# Altium PCB CoC-PCB V1 PANEL.PcbDoc
Units mm, origin at the board's own origin, x right, y up, seen from the top; angles counter-clockwise.
Board outline 263.06 x 101.25 mm, 4 copper layers (Top Layer, Mid-Layer 1, Mid-Layer 2, Bottom Layer), stack 1.508 mm thick; 8 components, 0 nets, 8 pads, 0 vias.
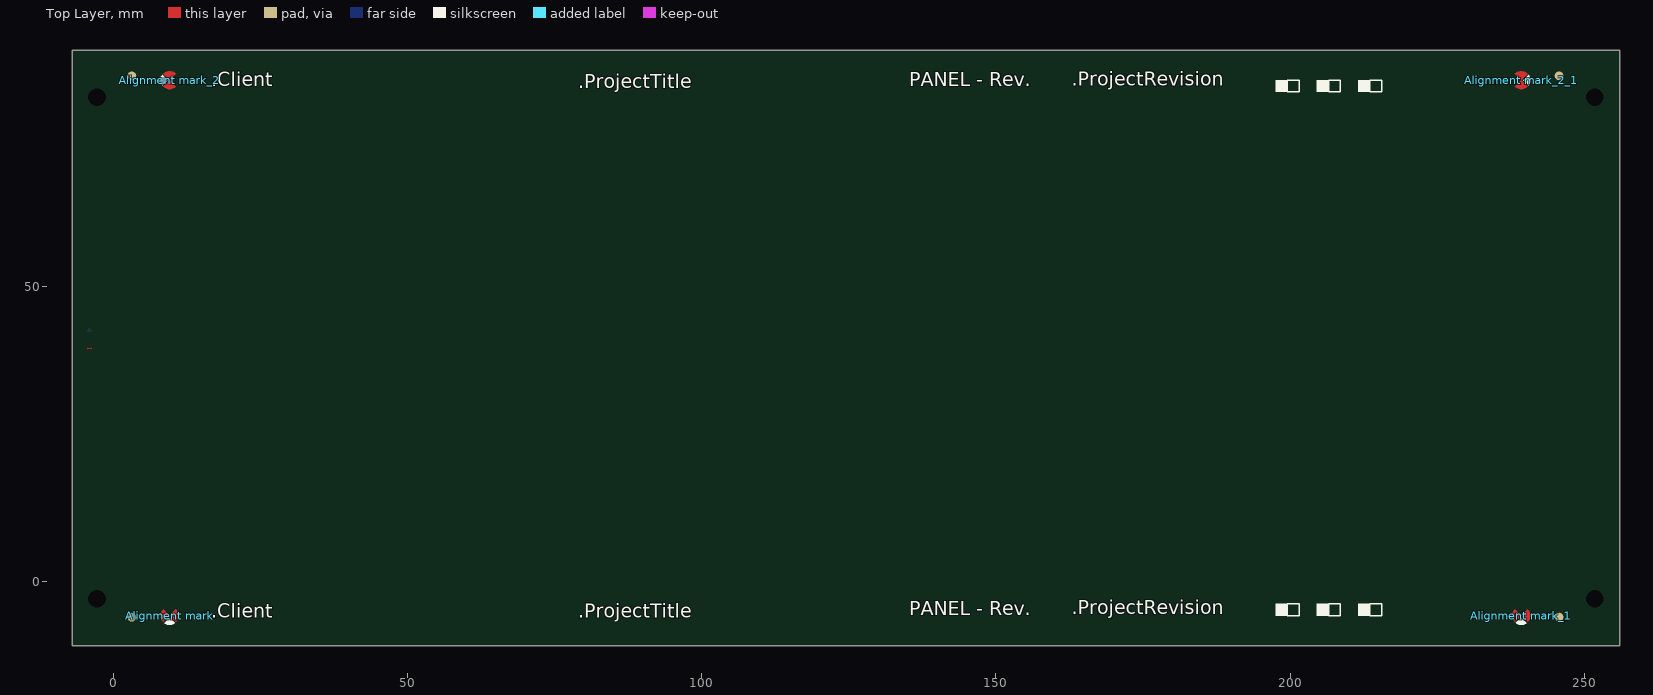
[diagram p0: Top Layer view]
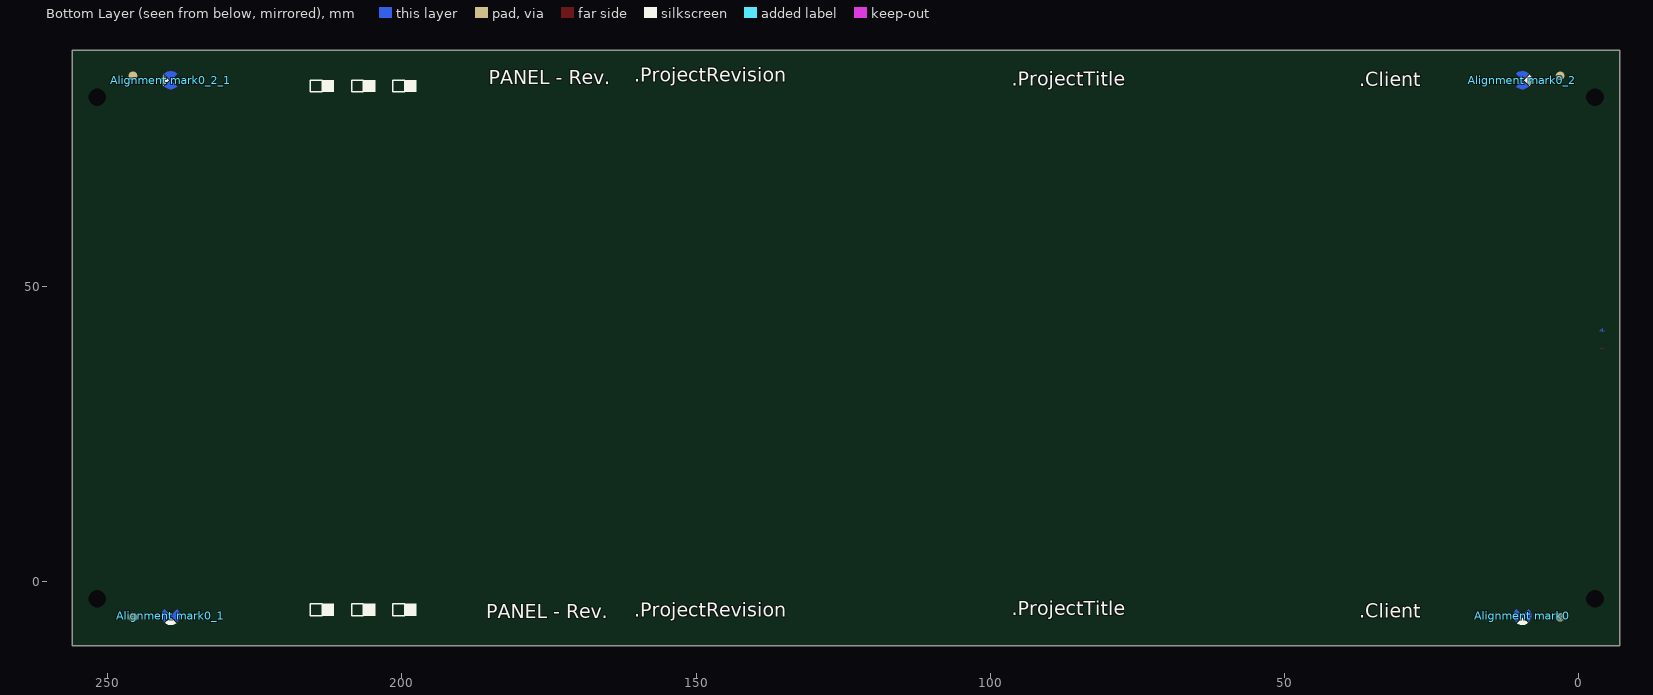
[diagram p1: Bottom Layer view, seen from below]
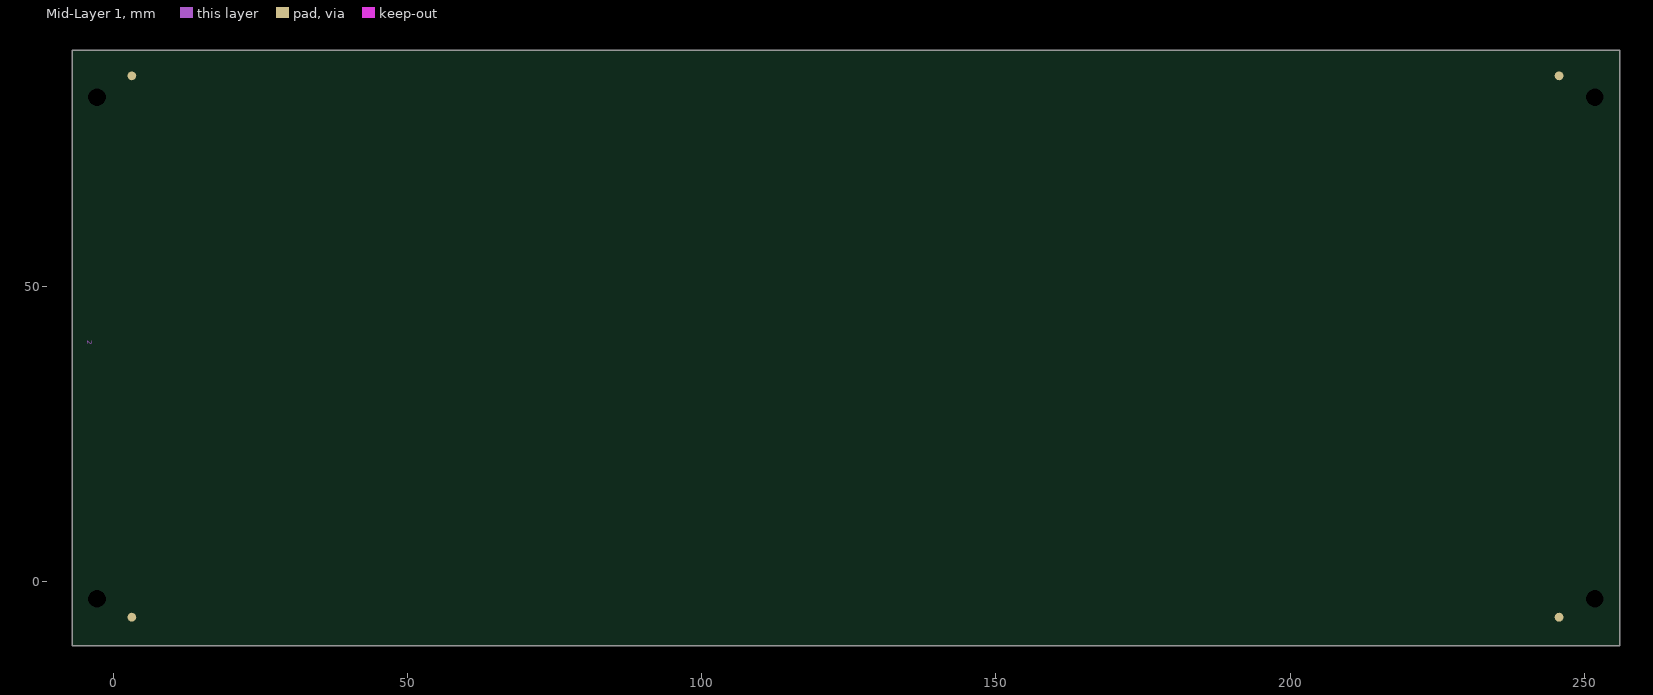
[diagram p2: Mid-Layer 1]
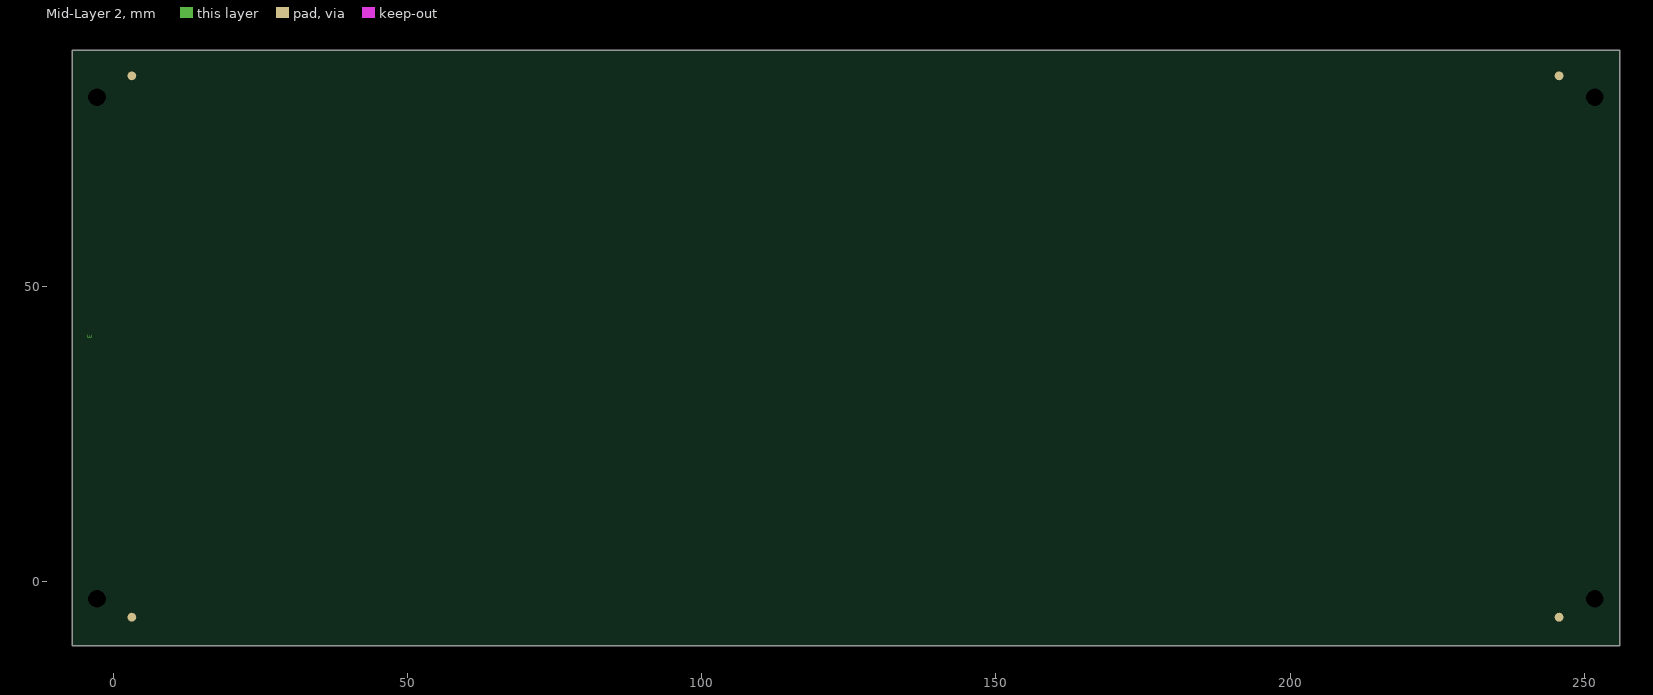
[diagram p3: Mid-Layer 2]

## Layer stack, top to bottom
Top Solder: solder mask 0.0102, Solder Resist, Dk 3.5
Top Layer: signal copper 0.018
Dielectric1: prepreg 0.1, FR-4, Dk 4.8
Mid-Layer 1: signal copper 0.036
Dielectric2: core 1.2, FR-4, Dk 4.8
Mid-Layer 2: signal copper 0.036
Dielectric3: prepreg 0.1, FR-4, Dk 4.8
Bottom Layer: signal copper 0.018
Bottom Solder: solder mask 0.0102, Solder Resist, Dk 3.5

## Board outline
-7.01,-10.999 -7.01,90.251 256.053,90.251 256.053,-10.999

## Design rules (kind name [scope] priority, off if disabled: settings)
Clearance [All] p1: gap=0.254 ignorepadtopadclearanceinfootprint=FALSE except(0: Arc-Hole Track-Hole SMDPad-Hole THPad-Hole Via-Hole Fill-Hole Poly-Hole Region-Hole Text-Hole)
PolygonConnect [All] p1: connectstyle=Relief reliefconductorwidth=0.254 reliefentries=4 polygonreliefangle="90 Angle" airgapwidth=0.254
RoutingVias [All] p1: holewidth=0.711 width=1.27 viastyle="Through Hole" minholewidth=0.711 minwidth=1.27 maxholewidth=0.711 maxwidth=1.27
SolderMaskExpansion [All] p1: expansion=0.102
Width [All] p1: maxlimit=0.254 minlimit=0.254 preferedwidth=0.254
30 further rules are at their usual default settings.

## Components (designator, comment, footprint, x,y, rotation, side; value= is the part's Value field where it differs from the comment)
"Alignment mark" "Alignment mark" "Alignment mark" 9.553,-5.849 r0 top
"Alignment mark0" "Alignment mark" "Alignment mark" 9.553,-5.849 r180 bottom
"Alignment mark0_1" "Alignment mark" "Alignment mark" 239.304,-5.849 r0 bottom
"Alignment mark0_2" "Alignment mark" "Alignment mark" 9.553,85.151 r90 bottom
"Alignment mark0_2_1" "Alignment mark" "Alignment mark" 239.304,85.151 r90 bottom
"Alignment mark_1" "Alignment mark" "Alignment mark" 239.304,-5.849 r180 top
"Alignment mark_2" "Alignment mark" "Alignment mark" 9.553,85.151 r270 top
"Alignment mark_2_1" "Alignment mark" "Alignment mark" 239.304,85.151 r270 top

## Footprints (in the part's own frame and the unit in brackets; to place one, negate y for a bottom-side part, rotate by r counter-clockwise, add the part's x,y. Pads: shape width x height; smd on the part's side, far side on the other; paste and mask are expansions set on the pad)
"Alignment mark" [mm]
  Top Layer region: 1.078,-1.078 1.408,-0.583 1.524,0 1.408,0.583 1.078,1.078 1.078,1.078 0,0
  Top Layer region: -1.078,-1.078 -1.408,-0.583 -1.524,0 -1.408,0.583 -1.078,1.078 -1.078,1.078 0,0
  silkscreen extent -0.9,-1.6 0.9,-0.36

## Free pads (board coordinates)
  round 0 hole 3 unplated: 0(-2.806,-2.999) 0(-2.806,82.251) 0(251.794,-2.999) 0(251.794,82.251)
  round 1.5 all layers, no hole mask+1: 0(3.128,-6.121) 0(3.128,85.889) 0(245.728,-6.121) 0(245.728,85.889)

## Nets (pads, with @x,y where several pads share a name; then routed paths per layer and width w, separated by ;. In a path a pad name is that pad's centre, name@x,y a point inside that pad or via, vN(x,y) a via of type N, cw(c..) or ccw(c..) an arc to the next point about the centre after c; other vN are vias at no path point)

## Other copper
Top Layer:
  text "1" at -4.427,39.919 h0.89 r270
Mid-Layer 1:
  text "2" at -4.453,40.935 h0.89 r270
Mid-Layer 2:
  text "3" at -4.427,41.951 h0.89 r270
Bottom Layer:
  text "4" at -4.427,42.967 h0.89 r270

## Silkscreen, mask and mechanical layers (free items; w line width, h text height)
Top Overlay:
  region: 213.553,83.151 211.553,83.151 211.553,85.151 213.553,85.151
  region: 206.553,83.151 204.553,83.151 204.553,85.151 206.553,85.151
  region: 199.553,83.151 197.553,83.151 197.553,85.151 199.553,85.151
  region: 199.553,-5.849 197.553,-5.849 197.553,-3.849 199.553,-3.849
  region: 206.553,-5.849 204.553,-5.849 204.553,-3.849 206.553,-3.849
  region: 213.553,-5.849 211.553,-5.849 211.553,-3.849 213.553,-3.849
  lines w0.254: 199.553,-5.849 201.553,-5.849 201.553,-3.849 199.553,-3.849 199.553,-5.849 ; 199.553,83.151 199.553,85.151 201.553,85.151 201.553,83.151 199.553,83.151 ; 206.553,-5.849 208.553,-5.849 208.553,-3.849 206.553,-3.849 206.553,-5.849 ; 206.553,83.151 206.553,85.151 208.553,85.151 208.553,83.151 206.553,83.151 ; 213.553,-5.849 215.553,-5.849 215.553,-3.849 213.553,-3.849 213.553,-5.849 ; 213.553,83.151 213.553,85.151 215.553,85.151 215.553,83.151 213.553,83.151
  text ".ProjectRevision" at 162.92,83.401 h4
  text ".Client" at 16.628,83.377 h4
  text "PANEL - Rev." at 135.288,83.331 h4
  text ".ProjectTitle" at 79,83 h4
  text ".ProjectRevision" at 162.92,-6.357 h4
  text "PANEL - Rev." at 135.288,-6.601 h4
  text ".Client" at 16.628,-6.987 h4
  text ".ProjectTitle" at 79,-7 h4
Bottom Overlay:
  region: 213.553,83.151 211.553,83.151 211.553,85.151 213.553,85.151
  region: 206.553,83.151 204.553,83.151 204.553,85.151 206.553,85.151
  region: 199.553,83.151 197.553,83.151 197.553,85.151 199.553,85.151
  region: 199.553,-5.849 197.553,-5.849 197.553,-3.849 199.553,-3.849
  region: 206.553,-5.849 204.553,-5.849 204.553,-3.849 206.553,-3.849
  region: 213.553,-5.849 211.553,-5.849 211.553,-3.849 213.553,-3.849
  lines w0.254: 199.553,-5.849 201.553,-5.849 201.553,-3.849 199.553,-3.849 199.553,-5.849 ; 199.553,83.151 199.553,85.151 201.553,85.151 201.553,83.151 199.553,83.151 ; 206.553,-5.849 208.553,-5.849 208.553,-3.849 206.553,-3.849 206.553,-5.849 ; 206.553,83.151 206.553,85.151 208.553,85.151 208.553,83.151 206.553,83.151 ; 213.553,-5.849 215.553,-5.849 215.553,-3.849 213.553,-3.849 213.553,-5.849 ; 213.553,83.151 213.553,85.151 215.553,85.151 215.553,83.151 213.553,83.151
  text ".ProjectRevision" at 160.553,84.151 h4
  text "PANEL - Rev." at 185.28,83.691 h4
  text ".ProjectTitle" at 96.309,83.419 h4
  text ".Client" at 37.261,83.377 h4
  text ".ProjectTitle" at 96.309,-6.55 h4
  text ".ProjectRevision" at 160.553,-6.849 h4
  text ".Client" at 37.261,-6.987 h4
  text "PANEL - Rev." at 185.694,-7.068 h4
Top Paste:
  drawing of 612 lines, arcs and shapes, not listed
  text ".Client" at -81.874,-165.828 h7
  text ".ProjectTitle" at -81.474,-172.553 h7
  text "Top Paste" at -81.174,-178.903 h7
  text "Rev:" at -81.174,-186.903 h7
  text ".ProjectRevision" at -67.174,-186.903 h7
  text "30/05/2019" at -81.174,-193.903 h7
Bottom Paste:
  drawing of 612 lines, arcs and shapes, not listed
  text ".Client" at 336.526,-165.828 h7
  text ".ProjectTitle" at 336.126,-172.553 h7
  text "Bottom Paste" at 335.826,-178.903 h7
  text ".ProjectRevision" at 321.826,-186.903 h7
  text "Rev:" at 335.826,-186.903 h7
  text "30/05/2019" at 335.826,-193.903 h7
Top Solder:
  rectangle: -4.935,38.903 -2.903,43.475
Bottom Solder:
  rectangle: -4.935,38.903 -2.903,43.475
Mechanical 1:
  the board outline again, w0.254
Mechanical 4:
  lines w0.127: -13.462,79.25 269.926,79.25 ; -9.828,0 269.926,0 ; 0,-15.983 0,92.61 ; 82.053,-16.078 82.053,92.61 ; 167.053,-16.085 167.053,92.604 ; 249.053,-15.983 249.053,92.61
  lines w0.2: -16.485,79.25 -14.46,79.25 ; -14.835,78.925 -14.46,79.25 ; -14.785,79.625 -14.46,79.25 ; -12.241,-0.127 -10.216,-0.127 ; -10.591,-0.452 -10.216,-0.127 ; -10.541,0.248 -10.216,-0.127 ; -0.372,93.485 0.003,93.16 ; -0.147,-17.322 0.228,-16.997 ; 0.003,95.185 0.003,93.16 ; 0.228,-19.022 0.228,-16.997 ; 0.328,93.535 0.003,93.16 ; 0.553,-17.372 0.228,-16.997 ; 81.669,-16.714 82.044,-16.389 ; 81.681,93.485 82.056,93.16 ; 82.044,-18.414 82.044,-16.389 ; 82.056,95.185 82.056,93.16 ; 82.369,-16.764 82.044,-16.389 ; 82.381,93.535 82.056,93.16 ; 166.669,-16.72 167.044,-16.395 ; 166.681,93.479 167.056,93.154 ; 167.044,-18.42 167.044,-16.395 ; 167.056,95.179 167.056,93.154 ; 167.369,-16.77 167.044,-16.395 ; 167.381,93.529 167.056,93.154 ; 248.678,-16.803 249.053,-16.478 ; 248.681,93.485 249.056,93.16 ; 249.053,-18.503 249.053,-16.478 ; 249.056,95.185 249.056,93.16 ; 249.378,-16.853 249.053,-16.478 ; 249.381,93.535 249.056,93.16 ; 271.23,78.774 270.905,79.149 ; 271.28,79.474 270.905,79.149 ; 271.605,-0.37 271.28,0.005 ; 271.655,0.33 271.28,0.005 ; 272.93,79.149 270.905,79.149 ; 273.305,0.005 271.28,0.005
  text "V-cut" at 0.428,100.71 h1 r90
  text "V-cut" at 82.481,100.71 h1 r90
  text "V-cut" at 167.481,100.704 h1 r90
  text "V-cut" at 249.481,100.71 h1 r90
  text "V-cut" at -22.01,78.825 h1
  text "V-cut" at 273.515,78.636 h1
  text "V-cut" at 273.89,-0.508 h1
  text "V-cut" at -17.766,-0.552 h1
  text "V-cut" at 82.469,-23.939 h1 r90
  text "V-cut" at 167.469,-23.945 h1 r90
  text "V-cut" at 249.478,-24.028 h1 r90
  text "V-cut" at 0.653,-24.547 h1 r90
Mechanical 6:
  drawing of 438 lines, arcs and shapes, not listed
  text "PLEASE REPORT ALL ERRORS" at 380.568,207.509 h3
  text "SPECIFICATION" at 399.364,199.889 h2.54
  text "TYPE" at 377.665,196.029 h1.52
  text "MULTI LAYER - FR4" at 409.89,196.029 h1.52
  text "PLATED THROUGH HOLE" at 409.89,193.489 h1.52
  text "FOUR (4) LAYER" at 409.863,190.534 h1.52
  text "LAYERS" at 377.665,190.314 h1.52
  text "GLASS FIBRE EPOXY RESIN NEMA" at 409.863,187.284 h1.52
  text "MATERIAL" at 377.665,187.139 h1.52
  text "GRADE FR4 Tg>=150-160C Td>=335C" at 409.89,184.599 h1.52
  text "FLAMMABILITY RATING 94-V0" at 409.89,182.186 h1.52
  text "FINISH" at 378.019,174.769 h1.52
  text "ENIG" at 409.355,174.694 h1.52
  text "TRACKS:" at 377.952,172.093 h1.52
  text "SOLDERMASK OVER BARE COPPER" at 409.18,171.466 h1.52
  text "PADS:" at 378.127,169.118 h1.52
  text "VIAS TENTED AS PER DESIGN FILE" at 409.555,168.691 h1.52
  text "35um" at 409.397,164.329 h1.52
  text "OUTER COPPER / (PRIMARY+SECONDARY)" at 377.774,162.424 h1.52
  text "THICKNESS (finished)" at 377.647,158.995 h1.52
  text "1.6 mm" at 409.524,158.995 h1.52
  text "NONE" at 409.778,155.312 h1.52
  text "BLIND OR BURIED VIAS" at 377.774,155.185 h1.52
  text "AS PER DESIGN FILE" at 409.778,151.121 h1.52
  text "INTERNAL CUTOUTS" at 377.647,150.867 h1.52
  text "EXTERNAL CUTOUTS" at 377.901,147.184 h1.52
  text "AS PER DESIGN FILE" at 409.905,147.184 h1.52
  text "Altium Designer .Application_BuildNumber" at 409.89,143.959 h1.52
  text "ARTWORK TYPE" at 377.774,143.374 h1.52
  text "MINIMUM TRACK WIDTH" at 377.665,140.149 h1.52
  text "7 mil (0.178mm)" at 409.89,140.149 h1.52
  text "MINIMUM CLEARANCE" at 377.665,137.609 h1.52
  text "5 mil (0.127mm)" at 409.89,137.609 h1.52
  text "MIMIMUM PAD WIDTH" at 377.79,135.219 h1.52
  text "7 mil (0.178mm)" at 409.946,135.028 h1.52
  text "SOLDER MASK" at 377.7,131.28 h1.52
  text "TYPE:" at 377.7,128.105 h1.52
  text "LIQUID PHOTOIMAGABLE" at 410.026,128.062 h1.52
  text "SIDES:" at 377.7,125.565 h1.52
  text "PRIMARY & SECONDARY" at 410.026,125.268 h1.52
  text "COLOUR:" at 377.74,122.344 h1.52
  text "BLACK" at 409.965,122.344 h1.52
  text "COMP OVERLAY" at 377.52,117.339 h1.52
  text "SIDES:" at 377.52,114.164 h1.52
  text "PRIMARY & SECONDARY" at 409.778,114.164 h1.52
  text "COLOUR:" at 377.52,111.116 h1.52
  text "WHITE - PHOTO IMAGEABLE" at 409.905,111.116 h1.52
  text "USE NC ROUTING" at 409.905,107.687 h1.52
  text "PROFILING" at 377.647,107.56 h1.52
  text "STANDARD" at 410.032,103.242 h1.52
  text "ELECTRICAL TEST" at 377.647,103.115 h1.52
  text "ISO9001:2000" at 409.933,99.696 h1.52
  text "MANUFACTURER'S / ACCREDITATION" at 377.52,96.638 h1.52
  text "ASSEMBLY NOTES" at 381.766,85.238 h5.08
  text "MANUFACTURING PROCESS" at 381.766,73.497 h3.05
  text "1. Reflow Top and Bottom side" at 383.036,67.825 h2.29
  text "2. Hand solder as required" at 383.036,62.745 h2.29
  text "ALL DIMENSIONS IN" at 400.873,46.141 h2.5
  text "MILLIMETRES, UNLESS" at 400.873,41.855 h2.5
  text "NOTED OTHERWISE" at 400.873,37.57 h2.5
  text "TOLERANCE" at 399.873,31.53 h3
  text "+" at 407.56,24.943 h2.43
  text "0.25mm" at 411.501,24.102 h2.5
  text "LIN." at 400.382,24.081 h2.43
  text "-" at 407.56,22.891 h2.43
  text "+" at 409.11,20.856 h2.43
  text "ANG." at 400.382,19.915 h2.43
  text "1.0 DEGREES" at 413.001,19.918 h2.5
  text "-" at 409.11,18.804 h2.43
  text "+" at 424.211,16.015 h2.43
  text "HOLE DIA" at 400.382,15.746 h2.43
  text "0.05mm" at 427.694,15.513 h2.5
  text "-" at 424.211,14.171 h2.43
  text "UNLESS OTHERWISE STATED" at 400.382,11.096 h1.5
  text "Layer" at 336.227,-8.856 h1.52
  text "Name" at 346.638,-8.856 h1.52
  text "Material" at 370.254,-8.856 h1.52
  text "Thickness" at 392.092,-8.856 h1.52
  text "Constant" at 408.598,-8.856 h1.52
  text "Board Layer Stack" at 423.072,-8.856 h1.52
  text "Top Overlay" at 346.638,-11.904 h1.52
  text "Top Solder" at 346.638,-14.952 h1.52
  text "Solder Resist" at 370.254,-14.952 h1.52
  text "0.010mm" at 392.092,-14.952 h1.52
  text "3.5" at 408.598,-14.952 h1.52
  text "1" at 336.227,-18 h1.52
  text "Top Layer" at 346.638,-18 h1.52
  text "Copper" at 370.254,-18 h1.52
  text "0.018mm" at 392.092,-18 h1.52
  text "Dielectric1" at 346.638,-21.048 h1.52
  text "FR-4" at 370.254,-21.048 h1.52
  text "0.100mm" at 392.092,-21.048 h1.52
  text "4.8" at 408.598,-21.048 h1.52
  text "2" at 336.227,-24.096 h1.52
  text "Mid-Layer 1" at 346.638,-24.096 h1.52
  text "Copper" at 370.254,-24.096 h1.52
  text "0.036mm" at 392.092,-24.096 h1.52
  text "Dielectric2" at 346.638,-27.144 h1.52
  text "FR-4" at 370.254,-27.144 h1.52
  text "1.200mm" at 392.092,-27.144 h1.52
  text "4.8" at 408.598,-27.144 h1.52
  text "3" at 336.227,-30.192 h1.52
  text "Mid-Layer 2" at 346.638,-30.192 h1.52
  text "Copper" at 370.254,-30.192 h1.52
  text "0.036mm" at 392.092,-30.192 h1.52
  text "Dielectric3" at 346.638,-33.24 h1.52
  text "FR-4" at 370.254,-33.24 h1.52
  text "0.100mm" at 392.092,-33.24 h1.52
  text "4.8" at 408.598,-33.24 h1.52
  text "4" at 336.227,-36.288 h1.52
  text "Bottom Layer" at 346.638,-36.288 h1.52
  text "Copper" at 370.254,-36.288 h1.52
  text "0.018mm" at 392.092,-36.288 h1.52
  text "Bottom Solder" at 346.638,-39.336 h1.52
  text "Solder Resist" at 370.254,-39.336 h1.52
  text "0.010mm" at 392.092,-39.336 h1.52
  text "3.5" at 408.598,-39.336 h1.52
  text "Bottom Overlay" at 346.638,-42.384 h1.52
  text "MECHANICAL LAYER LEGEND" at 334.559,-85.849 h5
  text "LAYER" at 335.292,-92.963 h2
  text "DESCRIPTION" at 348.573,-92.963 h2
  text "1" at 335.292,-97.315 h2
  text "BOARD OUTLINE" at 348.573,-97.315 h2
  text "2" at 335.292,-101.668 h2
  text "DIMENSIONS" at 348.573,-101.668 h2
  text "11" at 335.292,-106.02 h2
  text "BOARD CUTOUT" at 348.573,-106.02 h2
  text "4" at 335.292,-110.373 h2
  text "V-SCORE (V-CUT)" at 348.573,-110.373 h2
  text "6" at 335.292,-114.725 h2
  text "SPECIFICATIONS" at 348.573,-114.748 h2
  text "15" at 335.292,-119.078 h2
  text "COMPONENT COURTYARD" at 348.573,-119.078 h2
  text "16" at 335.292,-123.43 h2
  text "DOCUMENT OUTLINE" at 348.573,-123.43 h2
  text "~" at 335.292,-127.783 h2
  text "~" at 348.573,-127.784 h2
  text "~" at 335.292,-132.135 h2
  text "~" at 348.573,-132.135 h2
  text "~" at 335.292,-136.488 h2
  text "~" at 348.573,-136.488 h2
  text "ENGINEER:" at 250.504,-143.392 h1.14
  text "TITLE:" at 288.604,-143.392 h1.14
  text ".Engineer" at 251.774,-146.567 h1.78
  text "SHEET" at 154.748,-148.606 h2.4
  text "Tekt Industries Pty. Ltd." at 366.582,-149.869 h3.3
  text ".ProjectTitle" at 290.269,-150.278 h5
  text "PCB DESIGNER:" at 250.504,-150.885 h1.14
  text "SIZE" at 156.119,-152.721 h2.4
  text ".PCB_Designer" at 251.774,-154.314 h1.78
  text "386 Johnston Street" at 366.582,-156.698 h3.3
  text "DATE:" at 250.504,-158.632 h1.14
  text "PART NO.:" at 288.604,-158.632 h1.14
  text "PART NO.:" at 288.604,-158.632 h1.14
  text "REV:" at 341.944,-158.632 h1.14
  text ".ProjectRevision" at 347.532,-161.426 h1.78
  text ".ReleaseDate" at 251.774,-161.68 h1.78
  text "Abbotsford" at 366.582,-162.428 h3.3
  text "This document contains information which is provided AS IS, without attribution of liability or warranty under the GNU GPL v2.0 License - Open Source and permissive for commercial use, modification, distribution, and private use." at 173,-164 h1.78
  text "A2" at 154.746,-164.093 h7
  text "FILE NAME:" at 250.504,-166.252 h1.14
  text "DWG NO:" at 309.29,-166.25 h1.14
  text "SCALE:" at 341.944,-166.252 h1.14
  text "VIC 3067" at 366.582,-168.157 h3.3
  text "1:1" at 349.818,-169.046 h1.78
  text ".PCB_FILE_NAME_NO_PATH" at 259.471,-171.119 h1.78
Mechanical 7:
  circle w0.025: c-2.819,-2.999 r1.5
  circle w0.025: c-2.819,82.251 r1.5
  circle w0.025: c251.806,82.251 r1.5
  circle w0.025: c251.806,-2.999 r1.5
  lines w0.025: -2.327,-2.999 -1.319,-2.999 ; -2.327,82.251 -1.319,82.251 ; -1.319,-3.507 -1.319,-2.491 ; -1.319,81.743 -1.319,82.759 ; 250.306,-3.507 250.306,-2.491 ; 250.306,-2.999 251.314,-2.999 ; 250.306,81.743 250.306,82.759 ; 250.306,82.251 251.314,82.251
  text "MOUNT" at -4.672,79.833 h0.7
  text "MOUNT" at 250.394,79.833 h0.7
  text "MOUNT" at 250.394,-5.419 h0.7
  text "MOUNT" at -4.672,-5.519 h0.7
Mechanical 13:
  lines w0.051: -127.725,-212.628 376.274,291.372 ; -126.724,291.372 376.274,-212.628 ; -7.01,-10.999 256.053,90.251 ; -7.01,90.251 256.053,-10.999
Mechanical 16:
  lines w0.127: -101.794,-79.257 -94.174,-79.257 ; -101.794,20.438 -94.174,20.438 ; -101.794,120.133 -94.174,120.133 ; -30.928,-178.952 -30.928,-171.332 ; -30.928,212.208 -30.928,219.828 ; 39.684,-178.952 39.684,-171.332 ; 39.684,212.208 39.684,219.828 ; 110.55,-178.952 110.55,-171.332 ; 110.55,212.208 110.55,219.828 ; 181.416,-178.952 181.416,-171.332 ; 181.416,212.208 181.416,219.828 ; 252.155,-178.952 252.155,-171.332 ; 252.155,212.208 252.155,219.828 ; 323.021,-178.952 323.021,-171.332 ; 323.021,212.208 323.021,219.828 ; 393.76,-178.952 393.76,-171.332 ; 393.76,212.208 393.76,219.828 ; 457.006,-79.257 464.626,-79.257 ; 457.006,20.438 464.626,20.438 ; 457.006,120.133 464.626,120.133 ; -101.794,-178.952 464.626,-178.952 464.626,219.828 -101.794,219.828 -101.794,-178.952 ; -94.174,-171.332 457.006,-171.332 457.006,212.208 -94.174,212.208 -94.174,-171.332
  text "1" at -66.835,215.129 h1.78
  text "2" at 3.793,215.129 h1.78
  text "3" at 74.389,215.129 h1.78
  text "4" at 145.424,215.129 h1.78
  text "5" at 216.121,215.129 h1.78
  text "6" at 287.003,215.129 h1.78
  text "7" at 358.123,215.129 h1.78
  text "8" at 428.735,215.129 h1.78
  text "A" at -98.619,167.936 h1.78
  text "A" at 460.181,167.936 h1.78
  text "B" at -98.619,68.114 h1.78
  text "B" at 460.181,68.114 h1.78
  text "C" at -98.619,-31.454 h1.78
  text "C" at 460.181,-31.454 h1.78
  text "D" at -98.619,-131.276 h1.78
  text "D" at 460.181,-131.276 h1.78
  text "1" at -66.835,-175.777 h1.78
  text "2" at 3.793,-175.777 h1.78
  text "3" at 74.389,-175.777 h1.78
  text "4" at 145.424,-175.777 h1.78
  text "5" at 216.121,-175.777 h1.78
  text "6" at 287.003,-175.777 h1.78
  text "7" at 358.123,-175.777 h1.78
  text "8" at 428.735,-175.777 h1.78

## Dimensions
-13.462,79.25 to -7.01,90.251 on Mechanical 2
-9.828,0 to -7.01,-10.999 on Mechanical 2
249.053,-15.983 to 256.053,-10.999 on Mechanical 2
-7.01,-10.999 to 0,-15.983 on Mechanical 2
-7.01,90.251 to 256.053,90.251 on Mechanical 2
256.053,-10.999 to 256.053,90.251 on Mechanical 2

## Panel: embedded boards
"COC-Functional-PCB Draft V1_2.PcbDoc" at 2.108,2.135, 1 rows x 3 columns, spacing 83 x 85, rotation 0